# Altium PCB Reprogrammable Timer.PcbDoc
Units mm, origin at the board's own origin, x right, y up, seen from the top; angles counter-clockwise.
Board outline 40 x 40 mm, 2 copper layers (Top Layer, Bottom Layer), stack 1.1 mm thick; 10 components, 12 nets, 50 pads, 0 vias.
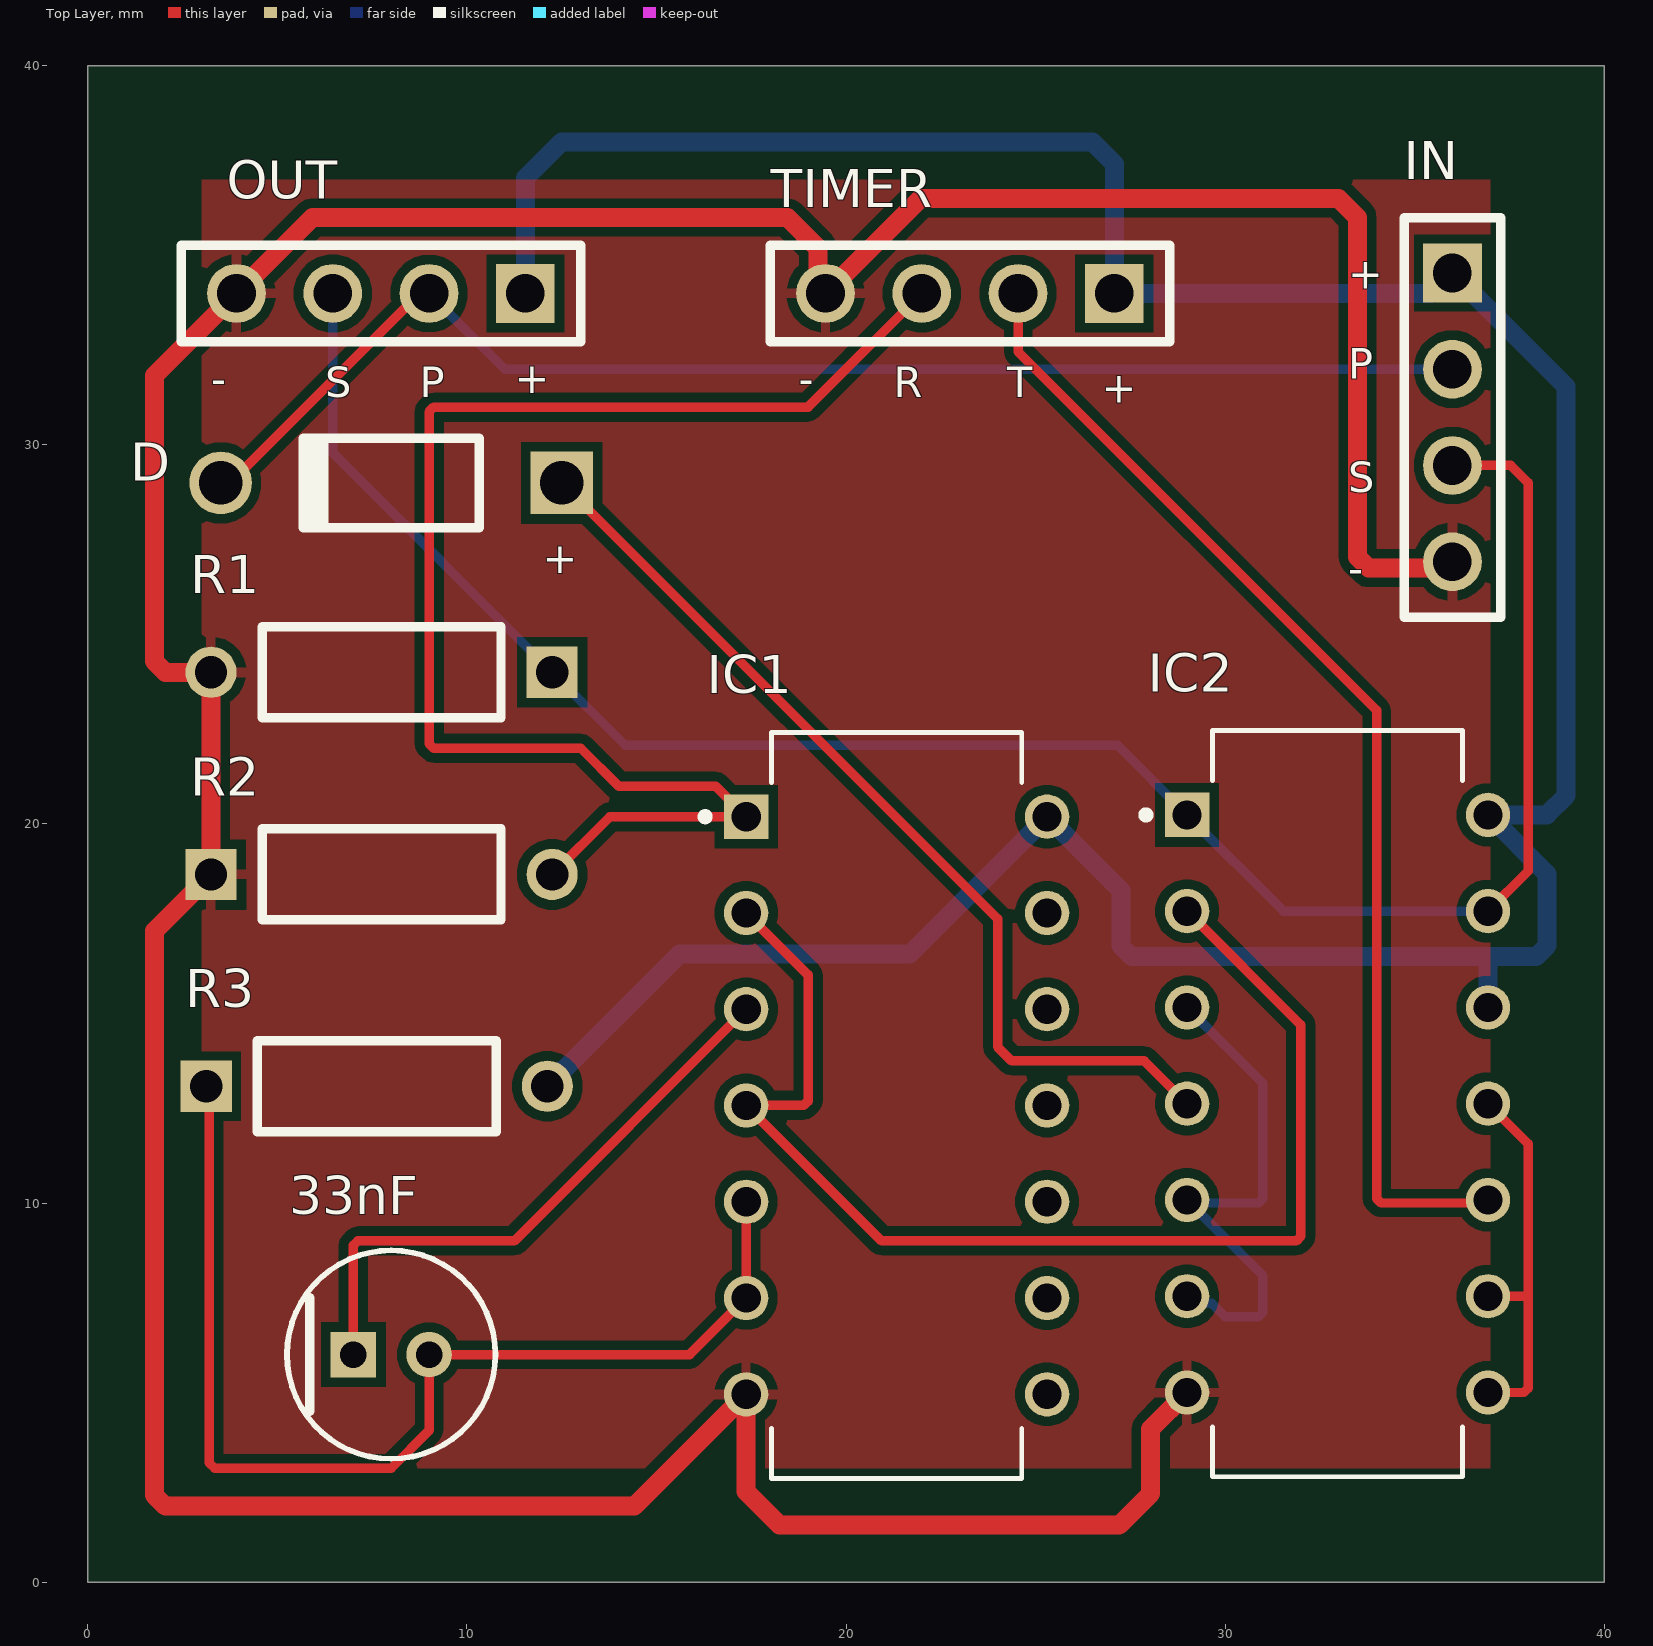
[diagram p0: Top Layer view]
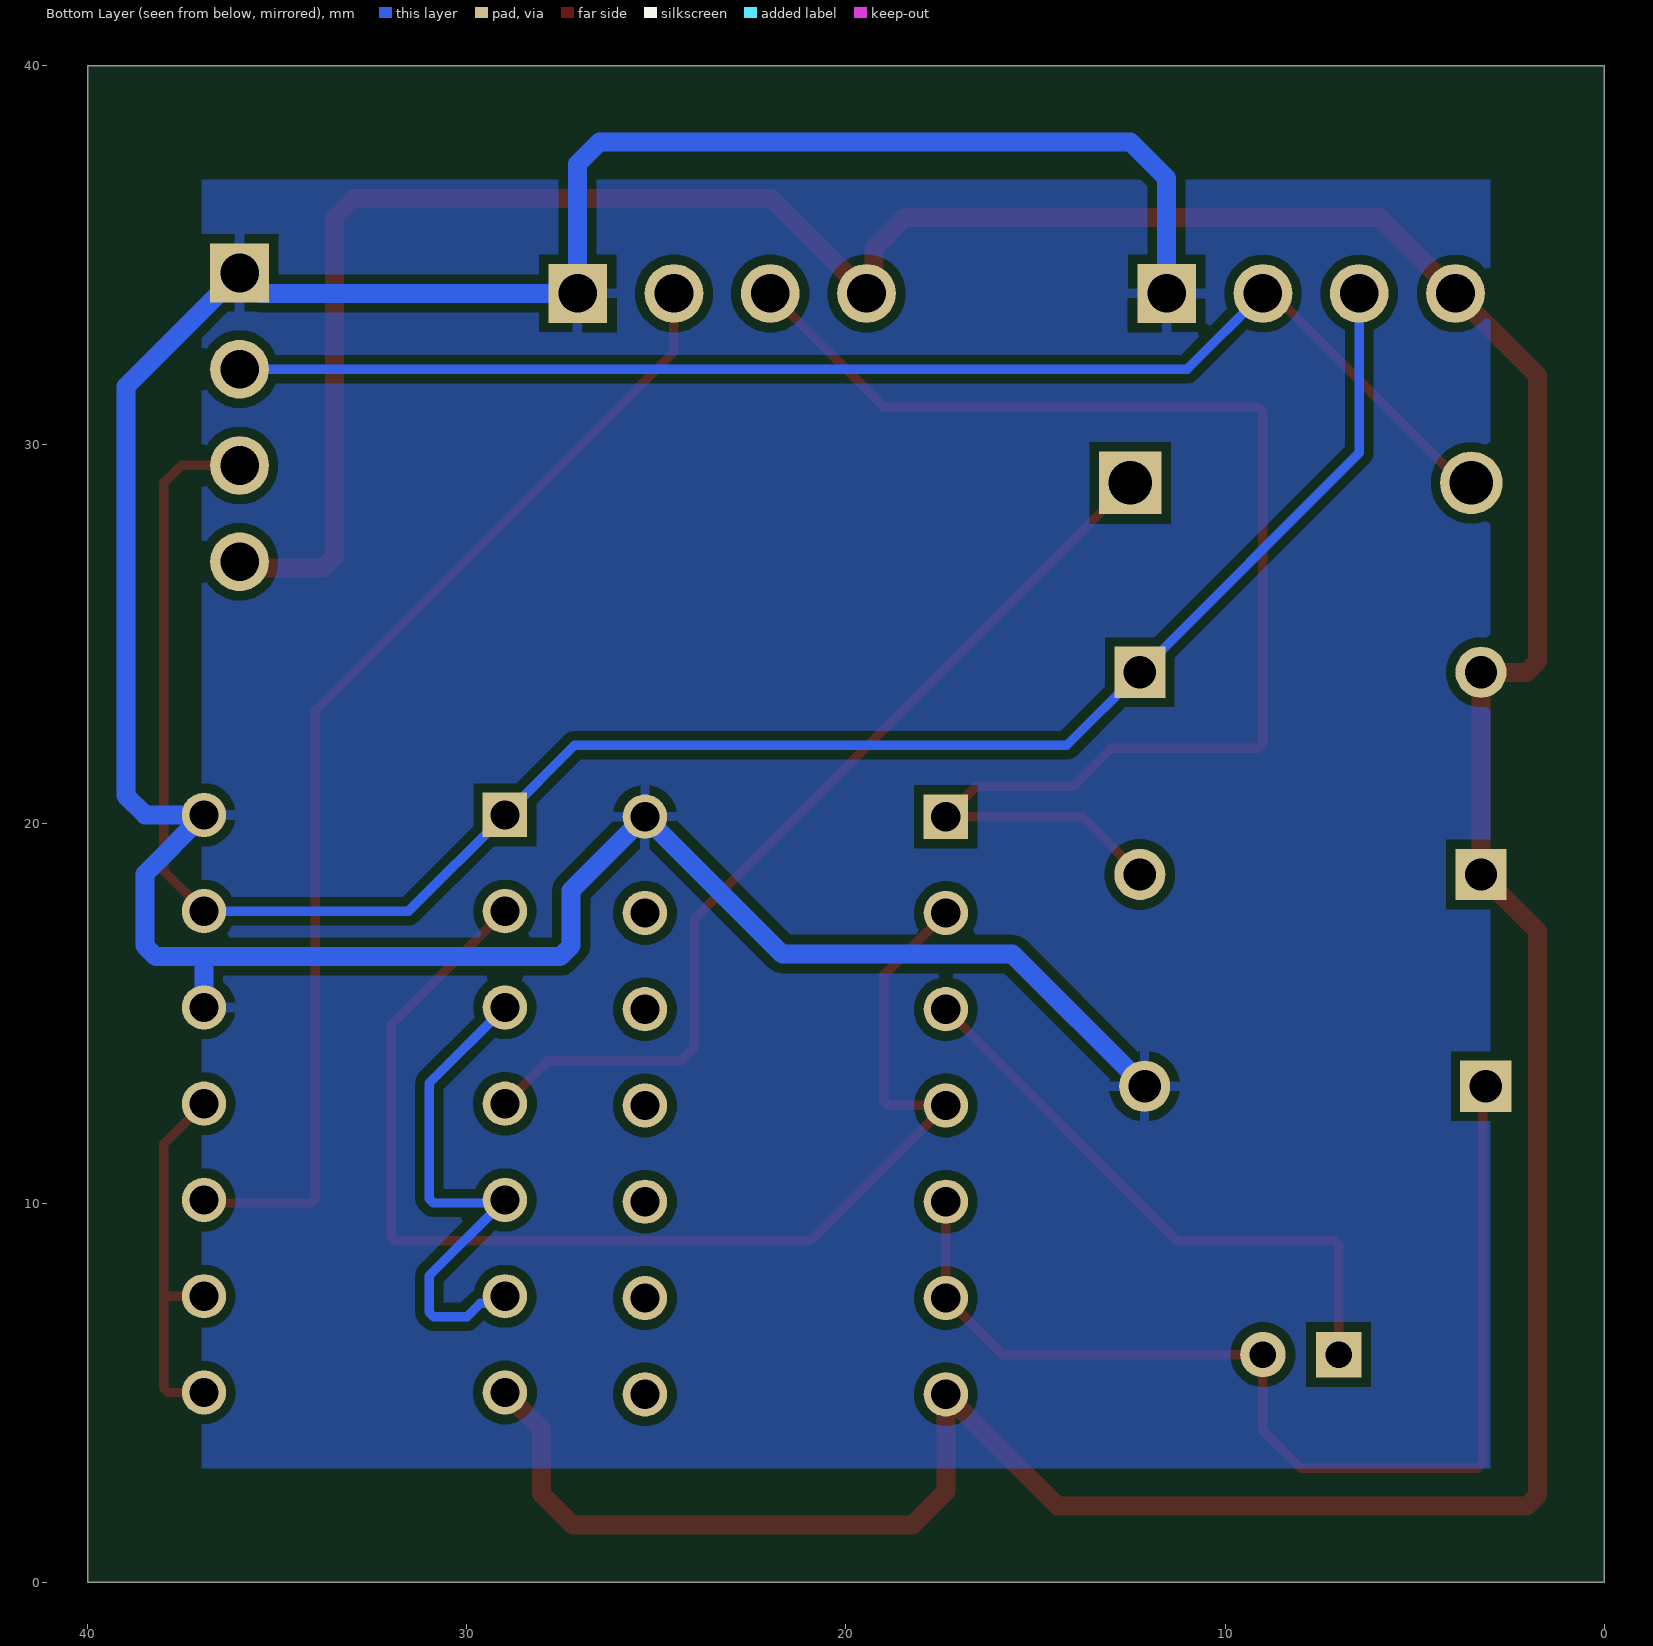
[diagram p1: Bottom Layer view, seen from below]

## Layer stack, top to bottom
Top Solder: solder mask 0.05, Solder Resist, Dk 3.5
Top Layer: signal copper 0.1
Dielectric 1: dielectric 0.9, FR-4, Dk 4.8
Bottom Layer: signal copper 0.1
Bottom Solder: solder mask 0.05, Solder Resist, Dk 3.5

## Board outline
0,0 40,0 40,40 0,40

## Design rules (kind name [scope] priority, off if disabled: settings)
Clearance [All] p1: gap=0.25 ignorepadtopadclearanceinfootprint=FALSE
PolygonConnect [All] p1: connectstyle=Relief reliefconductorwidth=0.254 reliefentries=4 polygonreliefangle="90 Angle" airgapwidth=0.254
RoutingVias [All] p1: holewidth=0.8 width=1.2 viastyle="Through Hole" minholewidth=0.8 minwidth=1.2 maxholewidth=0.8 maxwidth=1.2
SolderMaskExpansion [All] p1: expansion=0.102 istentingtop=FALSE
Width Width_Power [(InNet('VCC') OR InNet('GND'))] p1: maxlimit=0.6 minlimit=0.4 preferedwidth=0.5
Width [All] p2: maxlimit=0.3 minlimit=0.2 preferedwidth=0.25
30 further rules are at their usual default settings.

## Components (designator, comment, footprint, x,y, rotation, side; value= is the part's Value field where it differs from the comment)
33nF "EEUHD1H330" FP-RAD-TH-D_5_0_5-L_11_1-MFG 8,6 r0 top
D "1N4001-T" DIOD-DO-41-P-2_V 8,29 r180 top
IC1 "CD4001BE" DIP794W45P254L1969H508Q14 21.336,12.573 r0 top
IC2 "CD4011BE" DIP794W45P254L1969H508Q14 32.97,12.62 r0 top
IN "TSW-104-08-L-S" SMTC-TSW-104-08-X-S 36,34.54 r270 top
OUT "TSW-104-08-L-S" SMTC-TSW-104-08-X-S 11.54,34 r180 top
R1 "MFR-25FBF52-100K" RESA60-630X240 7.747,24.003 r180 top
R2 "MFR-25FBF52-100K" RESA60-630X240 7.747,18.669 r0 top
R3 "MFR-25FBF52-100K" RESA60-630X240 7.62,13.081 r0 top
TIMER "TSW-104-08-L-S" SMTC-TSW-104-08-X-S 27.08,34 r180 top

## Footprints (in the part's own frame and the unit in brackets; to place one, negate y for a bottom-side part, rotate by r counter-clockwise, add the part's x,y. Pads: shape width x height; smd on the part's side, far side on the other; paste and mask are expansions set on the pad)
DIOD-DO-41-P-2_V [mm] "2-Leads, Axial Lead, Body 4.635x2.36mm, Pin Spacing 9mm"
  rect 1.65x1.65 hole 1.15: 1(-4.5,0)
  round 1.65 hole 1.15: 2(4.5,0)
  silkscreen extent -2.32,-1.18 2.32,1.18, body extent -4.93,-1.18 4.93,1.18, height 2.35
DIP794W45P254L1969H508Q14 [mm]
  rect 1.17x1.17 hole 0.77: 1(-3.97,7.62)
  round 1.17 hole 0.77: 2(-3.97,5.08) 3(-3.97,2.54) 4(-3.97,0) 5(-3.97,-2.54) 6(-3.97,-5.08) 7(-3.97,-7.62) 8(3.97,-7.62) 9(3.97,-5.08) 10(3.97,-2.54) 11(3.97,0) 12(3.97,2.54) 13(3.97,5.08) 14(3.97,7.62)
  silkscreen extent -5.15,-9.84 3.3,9.84
FP-RAD-TH-D_5_0_5-L_11_1-MFG [mm]
  rect 1.2x1.2 hole 0.7 paste-1000 mask+0: 1(-1,0)
  round 1.2 hole 0.7 paste-1000 mask+0: 2(1,0)
  silkscreen extent -2.75,-2.75 2.75,2.75, body extent -2.85,-2.85 2.85,2.85, height 0.25
RESA60-630X240 [mm] "Axial Resistor, 2-Leads, Dia 2.4mm, Body Length 6.3mm"
  rect 1.35x1.35 hole 0.85: 1(-4.5,0)
  round 1.35 hole 0.85: 2(4.5,0)
  silkscreen extent -3.15,-1.2 3.15,1.2, body extent -3.15,-1.2 3.15,1.2, height 2.4
SMTC-TSW-104-08-X-S [mm] ".025 SQ Post Terminal Strip Assembly, 1x4 Pins, Vertical, 2.54mm Pitch, Male"
  rect 1.55x1.55 hole 1.02: 1(0,0)
  round 1.55 hole 1.02: 2(2.54,0) 3(5.08,0) 4(7.62,0)
  silkscreen extent -1.46,-1.27 9.08,1.27, body extent -1.27,-1.27 8.89,1.27, height 8.38

## Part data
33nF: library part CMP-05427-001662-1, "Aluminum Electrolytic Capacitors (Radial Lead Type) AEC-Q200 Qualified 33uF ±20% 50V", Capacitance=33uF, Case/Package=Radial, Max Operating Temperature=105°C, Min Operating Temperature=-55°C, Package Quantity=200, Ripple Current=90mA, Tolerance=20%, Voltage=50V, Construction=RADIAL, Diameter=5mm, Height=11mm, Height - Seated (Max)=0.492inch, Lead Diameter=0.5mm, Lead Pitch=2.5mm, Lead/Base Style=Straight, Length=11mm, Life (Hours)=1000Hour, Mount="Through Hole", Packaging=Bulk, Polarity=Polar, REACH SVHC="No SVHC", Ripple Current (AC)=90mA, RoHS Compliant=Yes, Series=HD, Termination=Radial, Voltage Rating=50V, Voltage Rating (DC)=50V
D: library part CMP-0639-00006-2, "1.0 A Rectifier, 15 pF, 50 V, -65 to 150 degC, 2-Pin DO-41 Plastic, RoHS, Tape and Reel", Manufacturer="Diodes Inc", Max. Average Rectified Current IO (A)=1, Operating Temperature Range (degC)="-65 to 150", ComponentLink1Description="Manufacturer URL", ComponentLink1URL=http://diodes.com/, ComponentLink2Description=Datasheet, ComponentLink2URL=http://diodes.com/datasheets/ds28002.pdf, CT (pF)=15, DatasheetVersion="Rev. 8-2", Max. IFSM (A)=30, Max. IR (uA)=5, Mounting Technology="Through Hole", PackageDescription="2-Pin Axial Lead, Body 4.635 x 2.36 mm, Lead Spread 25.4 mm", PackageReference=DO-41-P-2, Packing="Tape and Reel", PartNumber=1N4001-T, RoHS=TRUE, VF (V)=1, VRRM (V)=50
IC1: "CMOS Quad 2-Input NOR Gate 14-PDIP -55 to 125", Package="PDIP-14 Texas Instruments", Availability=Unavailable, DigiKey-Purchase-URL=https://snapeda.com/shop?store=DigiKey&id=2748659, MF="Texas Instruments", Mouser-Purchase-URL=https://snapeda.com/shop?store=Mouser&id=2748659, MP=CD4001BE, Price=None, SnapEDA_Link=https://www.snapeda.com/parts/CD4001BE/Texas%20Instruments/view-part/2748659/?ref=snap, Texas_Instruments-Purchase-URL=https://snapeda.com/shop?store=Texas+Instruments&id=2748659
IC2: Package=None, Availability=Unavailable, MP=CD4011BE, Price=None
IN OUT TIMER: library part CMP-1024-00358-1, "0.025\" SQ Post Header, Through-hole, Vertical, -55 to 125 degC, 2.54 mm Pitch, 4-Pin, Male, RoHS", Manufacturer=Samtec, Temperature Range="-55 to 125 degC", ComponentLink1Description="Manufacturer URL", ComponentLink1URL=http://www.samtec.com, ComponentLink2Description=Datasheet, ComponentLink2URL=http://www.samtec.com/documents/webfiles/pdf/TSW_TH.PDF, ComponentLink3Description="Package Specification", ComponentLink3URL=http://www.samtec.com/documents/webfiles/cpdf/TSW-XXX-XX-XXX-X-XX-XXX-MKT.pdf, DatasheetVersion=F-214, Mounting Technology=Through-hole, Orientation=Vertical, PackageDescription=".025[0.64] SQ. Post Terminal Strip Assembly", PackageReference=TSW-104-08-X-S, PackageVersion="DM, 8/1988", PartNumber=TSW-104-08-L-S, Pitch="2.54 mm", RoHS=True
R1 R2 R3: library part CMP-1659-00073-1, "Axial Resistor, 100 KOhm, +/- 1%, 0.25 W, -55 to 155 degC, 2-Pin THD, RoHS, Bulk", Case\Package=Axial, Max Operating Temperature="155 degC", Min Operating Temperature="-55 degC", Package Quantity=200, Power Rating="250 mW", Resistance="475 Ohm", Tolerance=1%, Voltage Rating="250 V", ComponentLink1Description="Manufacturer URL", ComponentLink1URL=http://www.yageo.com/, ComponentLink2Description=Datasheet, ComponentLink2URL=http://www.yageo.com/documents/recent/Yageo%20LR_MFR_2013.pdf, DatasheetVersion=Apr-13, Length="0.248 inch", Mount="Through Hole", PackageDescription="2-Pin Axial Lead, Dia 2.4 mm, Body Length 6.3 mm", PackageReference=MFR-25, Packaging=Bulk, RoHSCompliant=true

## Nets (pads, with @x,y where several pads share a name; then routed paths per layer and width w, separated by ;. In a path a pad name is that pad's centre, name@x,y a point inside that pad or via, vN(x,y) a via of type N, cw(c..) or ccw(c..) an arc to the next point about the centre after c; other vN are vias at no path point)
GND: IC1.7 IC2.7 IN.4 OUT.4 R1.2 R2.1 TIMER.4 | length 113.2
  Top Layer w0.5: IC2.7 28.039,4.039 28.039,2.332 27.207,1.5 18.25,1.5 17.366,2.384 IC1.7 14.413,2 2.043,2 1.75,2.293 1.75,17.172 R2.1 R1.2 2.043,24.003 1.75,24.296 1.75,31.83 OUT.4 5.92,36 18.457,36 19.259,35.198 19.259,34.201 TIMER.4 21.96,36.5 33,36.5 33.5,36 33.5,27.043 33.793,26.75 35.83,26.75 IN.4
Net33nF_1: 33nF.1 IC1.3 | length 15.8
  Top Layer w0.25: 33nF.1 7,8.883 7.117,9 11.253,9 IC1.3
Net33nF_2: 33nF.2 IC1.5 IC1.6 R3.1 | length 29.8
  Top Layer w0.25: R3.1 3.197,13.004 3.197,3.146 3.343,3 8,3 9,4 33nF.2 15.873,6 IC1.6 IC1.5
NetD_1: D.1 IC2.4 | length 25.3
  Top Layer w0.25: D.1 24,17.5 24,14.117 24.367,13.75 27.87,13.75 IC2.4
NetIC1_2: IC1.2 IC1.4 IC2.2 | length 33.3
  Top Layer w0.25: IC1.2 19,16.019 19,12.69 18.883,12.573 IC1.4 20.939,9 31.883,9 32,9.117 32,14.7 IC2.2
NetIC2_3: IC2.3 IC2.5 IC2.6 | length 13.9
  Bottom Layer w0.25: IC2.6 29.186,7.354 29.646,7.354 30,7 30.883,7 31,7.117 31,8.08 IC2.5@29.08,10 ; IC2.5 IC2.5@29.08,10 ; IC2.3 31,13.16 31,10.117 30.883,10 IC2.5@29.08,10
NetIC2_8: IC2.8 IC2.9 IC2.11 | length 10.1
  Top Layer w0.25: IC2.8 37.883,5 38,5.117 38,7.54 ; IC2.9 38,7.54 ; IC2.11 38,11.56 38,7.54
Pulse: D.2 IN.2 OUT.2 | length 35.4
  Top Layer w0.25: D.2 3.75,29 8.75,34 OUT.2
  Bottom Layer w0.25: OUT.2 11,32 IN.2
Relay: IC1.1 R2.2 TIMER.3 | length 38
  Top Layer w0.25: R2.2 13.771,20.193 IC1.1 16.559,21 14,21 13,22 9.117,22 9,22.117 9,30.883 9.117,31 19,31 TIMER.3
Status: IC2.1 IC2.13 IN.3 OUT.3 R1.1 | length 53.6
  Top Layer w0.25: IN.3 37.54,29.46 38,29 38,18.76 IC2.13
  Bottom Layer w0.25: OUT.3 6.46,29.79 R1.1 14.174,22.076 27.164,22.076 IC2.1 31.54,17.7 IC2.13
Trigger: IC2.10 TIMER.2 | length 30.8
  Top Layer w0.25: TIMER.2 24.54,32.46 34,23 34,10.117 34.117,10 36.86,10 IC2.10
VCC: IC1.14 IC2.12 IC2.14 IN.1 OUT.1 R3.2 TIMER.1 | length 86.4
  Bottom Layer w0.5: OUT.1 11.54,37.04 12.5,38 26.5,38 27.08,37.42 TIMER.1 35.46,34 IN.1 39,31.54 39,20.75 38.49,20.24 IC2.14 38.5,18.68 38.5,16.793 38.207,16.5 37,16.5 ; R3.2 15.607,16.568 21.681,16.568 IC1.14 27.25,18.249 27.25,16.793 27.543,16.5 37,16.5 ; IC2.12 36.94,16.44 37,16.5
pads on no net: IC1.8 IC1.9 IC1.10 IC1.11 IC1.12 IC1.13

## Polygon pours and split planes (outlines as drawn)
VCC on Bottom Layer "VCC_L02_P002" (solid, remove dead copper, pour order 2): 3,37 3,3 37,3 37,37
GND on Top Layer "GND_L01_P003" (solid, remove dead copper, pour order 3): 3,37 3,3 37,3 37,37

## Silkscreen, mask and mechanical layers (free items; w line width, h text height)
Top Overlay:
  text "+" at 33.254,34.121 h0.8
  text "P" at 33.254,31.754 h0.8
  text "+" at 11.254,31.371 h0.8
  text "-" at 3.254,31.354 h0.8
  text "-" at 18.754,31.354 h0.8
  text "S" at 6.254,31.254 h0.8
  text "P" at 8.754,31.254 h0.8
  text "R" at 21.254,31.254 h0.8
  text "T" at 24.254,31.254 h0.8
  text "+" at 26.754,31.121 h0.8
  text "S" at 33.254,28.754 h0.8
  text "+" at 12.004,26.621 h0.8
  text "-" at 33.254,26.354 h0.8